# Altium PCB DCDC_POWER_SUPPLY.PcbDoc (part 2 of 2)
Units mm, origin at the board's own origin, x right, y up, seen from the top; angles counter-clockwise.
Board outline 45 x 24.5 mm, 4 copper layers (Top Layer, GND 1, GND 2, Bottom Layer), stack 0.603 mm thick; 43 components, 28 nets, 132 pads, 68 vias.
Unrouted connection lines stored in the file: 3.
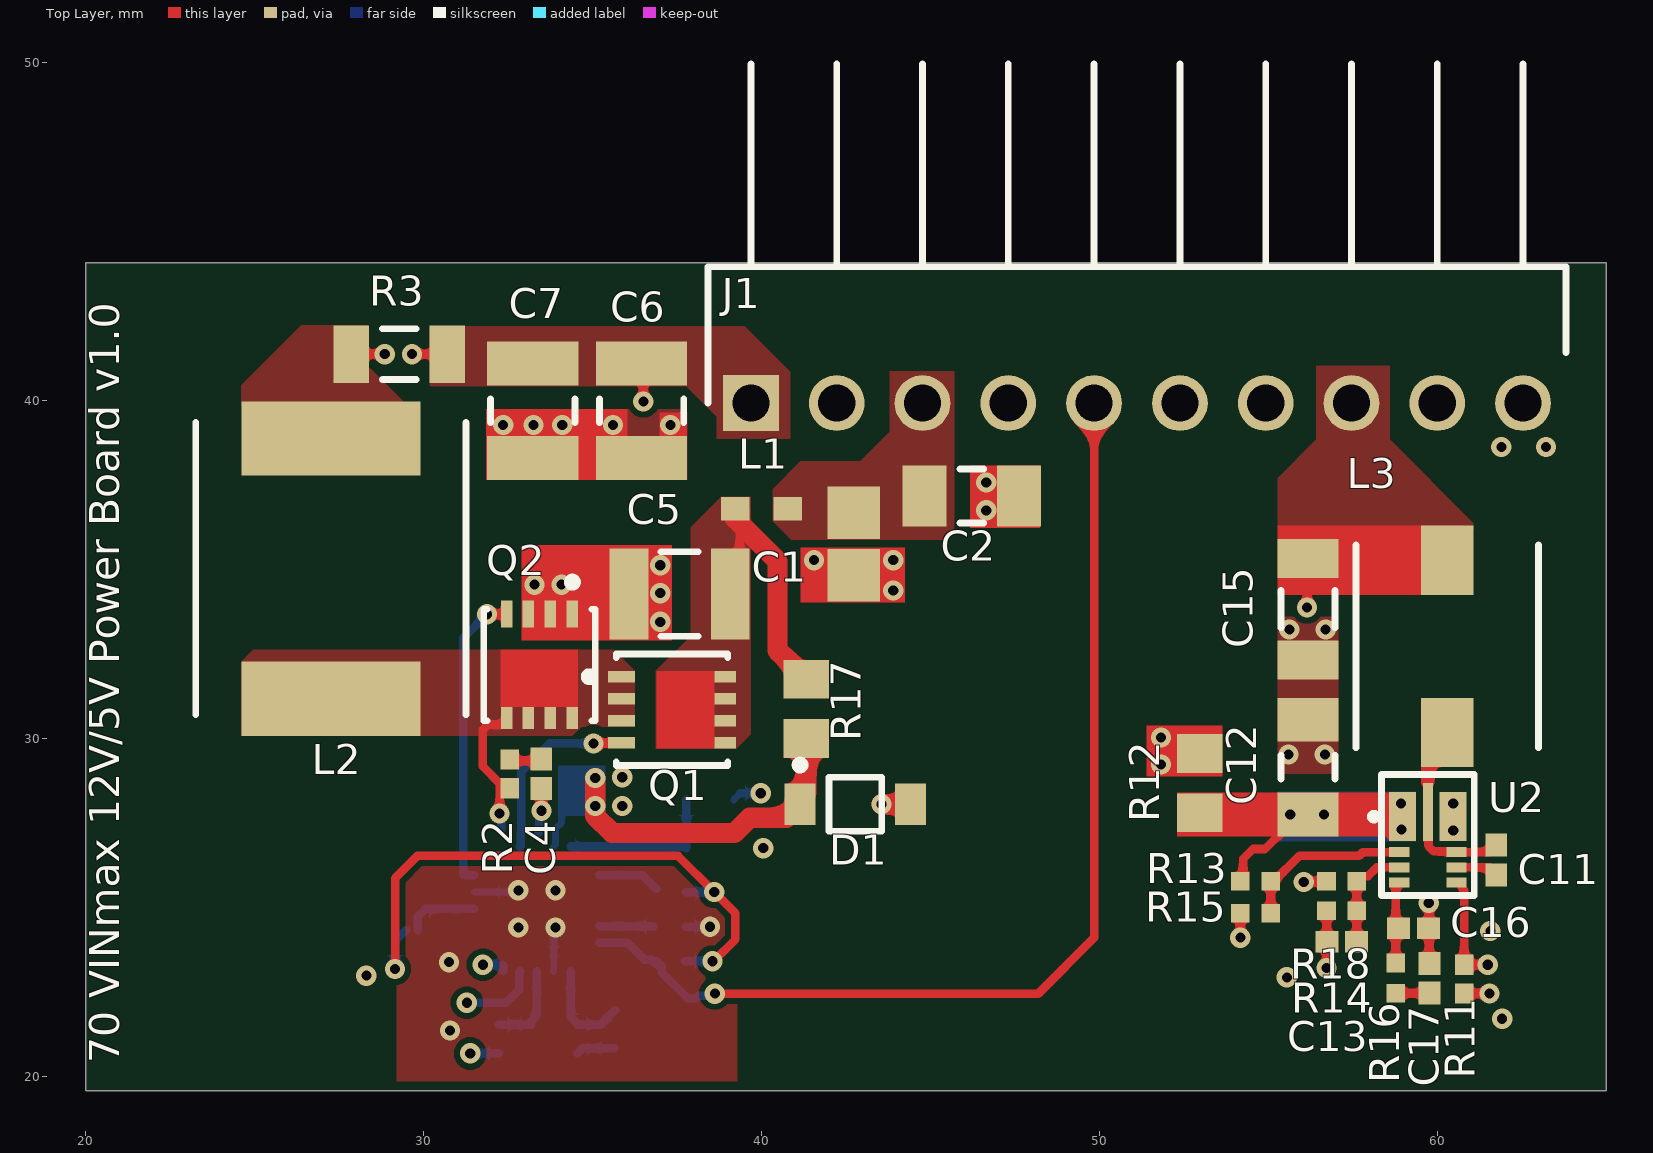
[diagram p0: Top Layer view]

## Part data (continued)
R1: library part CMP-2000-04829-1, "RES SMD 1M OHM 1% 1/10W 0603", Case Code (Imperial)=0603, Case Code (Metric)=1608, Manufacturer=Yageo, Manufacturer Part Number=AC0603FR-071ML, Max Operating Temperature=155°C, Max Power Dissipation=100mW, Min Operating Temperature=-55°C, Package Quantity=1, Resistance=1MR, Resistor Type="Thick Film", Supplier Part Number 1=311-1MLDCT-ND, Temperature coefficient=100ppm/°C, Tolerance=1%, Voltage Rating=50V, Case/Package=0603, Category="Chip SMD Resistors", ComponentLink1Description=https://datasheet.ciiva.com/5562/pyu-ac-51-rohs-l-2-5562551.pdf?src-supplier=Mouser, ComponentLink1URL=https://datasheet.ciiva.com/5562/pyu-ac-51-rohs-l-2-5562551.pdf?src-supplier=Mouser, Features="Moisture Resistant,Automotive AEC-Q200,Anti-Sulfur", Height=0.022inch, Lead Free="Lead Free", Length=0.063inch, Number of Terminations=2, Packaging="Tape and Reel", Part Number=AC0603FR-071ML, Power Rating=100mW, Pricing 1="1=0.10000, 10=0.02900, 100=0.01170, 1000=0.00527, 2500=0.00458 (USD)", RoHS=Yes, RoHS Compliant=Yes, Series=AC, Stock 1=1569, Supplier 1=Digi-Key, Termination=SMD/SMT, Width=0.031inch
R2: library part CMP-2002-07060-1, "Res Thick Film 0402 3.3 Ohm 1% 1/16W ±200ppm/°C Molded SMD Paper T/R", Case Code (Imperial)=0402, Case Code (Metric)=1005, Manufacturer="Yageo / Phycomp", Manufacturer Part Number=RC0402FR-073R3L, Max Operating Temperature=155°C, Max Power Dissipation=63mW, Min Operating Temperature=-55°C, Resistance=3.3R, Resistance Tolerance=1%, Resistor Type="Thick Film", Supplier Part Number 1=311-3.30LRCT-ND, Temperature coefficient=200ppm/°C, Voltage Rating=50V, Case/Package=0402, Category="Chip SMD Resistors", ComponentLink1Description=https://datasheet.ciiva.com/28412/pyu-rc0402-51-rohs-l-6-28412729.pdf?src-supplier=Avnet+Europe, ComponentLink1URL=https://datasheet.ciiva.com/28412/pyu-rc0402-51-rohs-l-6-28412729.pdf?src-supplier=Avnet+Europe, ComponentLink2Description=https://datasheet.ciiva.com/16856/pyu-rc0402-51-rohs-l-6-16856956.pdf?src-supplier=Avnet+Europe, ComponentLink2URL=https://datasheet.ciiva.com/16856/pyu-rc0402-51-rohs-l-6-16856956.pdf?src-supplier=Avnet+Europe, ComponentLink3Description=https://datasheet.ciiva.com/7849/1018594-7849999.pdf?src-supplier=Element14, ComponentLink3URL=https://datasheet.ciiva.com/7849/1018594-7849999.pdf?src-supplier=Element14, ComponentLink4Description=https://datasheet.ciiva.com/8893/pyu-rc0402-51-rohs-l-6-8893711.pdf?src-supplier=Avnet, ComponentLink4URL=https://datasheet.ciiva.com/8893/pyu-rc0402-51-rohs-l-6-8893711.pdf?src-supplier=Avnet, Construction=Rectangular, Contact Plating=Tin,Matte, Depth=0.5mm, Features="Moisture Resistant", Lead Free="Lead Free", Length=1mm, Military Standard=Not, Number of Terminations=2, Packaging="Tape and Reel", Part Number=RC0402FR-073R3L, Power Rating=63mW, Pricing 1="1=0.10000, 10=0.02400, 100=0.00960, 1000=0.00431, 2500=0.00374, 5000=0.00309 (USD)", REACH SVHC=Unknown, RoHS=Yes, RoHS Compliant=Yes, Series=RC, Size Code=0402, Stock 1=461211, Supplier 1=Digi-Key, Termination=SMD/SMT, Tolerance=1%, Voltage Rating (DC)=50V
R3: library part CMP-2003-04053-1, Case Code (Imperial)=1206, Case Code (Metric)=3216, Manufacturer=Yageo, Manufacturer Part Number=RL1206FR-070R027L, Max Operating Temperature=125°C, Max Power Dissipation=250mW, Min Operating Temperature=-55°C, Package Quantity=5000, Resistance=27mR, Resistor Type="Thick Film", Supplier Part Number 1=311-.027LWCT-ND, Temperature coefficient=1200ppm/°C, Tolerance=1%, Case/Package=1206, Category="Chip SMD Resistors", ComponentLink1Description=https://datasheet.ciiva.com/15328/pyu-rl-521-rohs-l-5-15328789.pdf?src-supplier=Mouser, ComponentLink1URL=https://datasheet.ciiva.com/15328/pyu-rl-521-rohs-l-5-15328789.pdf?src-supplier=Mouser, Construction=Rectangular, Depth=1.6mm, Features="Moisture Resistant,Automotive AEC-Q200", Height=0.55mm, Length=3.1mm, Military Standard=Not, Number of Terminations=2, Packaging="Tape and Reel", Part Number=RL1206FR-070R027L, Power Rating=250mW, Pricing 1="1=0.70000, 10=0.54000, 100=0.22710, 1000=0.12530, 2500=0.11747 (USD)", RoHS=Yes, RoHS Compliant=Yes, Series=RL, Stock 1=6389, Supplier 1=Digi-Key, Technology="THICK FILM", Termination=SMD/SMT, Weight=0.000571oz, Width=1.6mm
R4: library part CMP-2100-03662-1, "Chip Resistor, 100 KOhm, +/- 1%, 0.1 W, -55 to 155 degC, 0603 (1608 Metric), RoHS, Tape and Reel", Case Code (Imperial)=0603, Case Code (Metric)=1608, Manufacturer=Yageo, Manufacturer Part Number=RC0603FR-07100KL, Max Operating Temperature=155degC, Max Power Dissipation=100mW, Min Operating Temperature=-55degC, Package Description="2-Pin Surface Mount Device, Body 1.6 x 0.8 mm", Resistance=100KOhm, Resistance Tolerance=1%, Resistor Type="Thick Film", Supplier Part Number 1=311-100KHRCT-ND, Temperature coefficient=100ppm/degreesC, Voltage Rating=50V, Working Voltage=75V, Case/Package=0603, Category="Chip SMD Resistors", ComponentLink1Description=https://datasheet.ciiva.com/11808/0900766b80f96399-11808107.pdf?src-supplier=RSComponents, ComponentLink1URL=https://datasheet.ciiva.com/11808/0900766b80f96399-11808107.pdf?src-supplier=RSComponents, ComponentLink2Description=https://datasheet.ciiva.com/7983/443971-7983593.pdf?src-supplier=Element14, ComponentLink2URL=https://datasheet.ciiva.com/7983/443971-7983593.pdf?src-supplier=Element14, ComponentLink3Description=https://datasheet.ciiva.com/46440/1868787-46440889.pdf?src-supplier=Element14, ComponentLink3URL=https://datasheet.ciiva.com/46440/1868787-46440889.pdf?src-supplier=Element14, ComponentLink4Description=https://datasheet.ciiva.com/7746/1738695-7746234.pdf?src-supplier=Element14, ComponentLink4URL=https://datasheet.ciiva.com/7746/1738695-7746234.pdf?src-supplier=Element14, ComponentLink5Description=https://datasheet.ciiva.com/7746/1738695-7746235.pdf?src-supplier=Element14, ComponentLink5URL=https://datasheet.ciiva.com/7746/1738695-7746235.pdf?src-supplier=Element14, ComponentLink6Description=https://datasheet.ciiva.com/22747/443971-22747516.pdf?src-supplier=Element14, ComponentLink6URL=https://datasheet.ciiva.com/22747/443971-22747516.pdf?src-supplier=Element14, Composition=ThickFilm, Construction=Rectangular, Datasheet URL=http://www.yageo.com/NewPortal/yageodocoutput?fileName=/pdf/R-Chip/PYu-RC_Group_51_RoHS_L_5.pdf, Datasheet Version="Rev. 5, 10/2016", Depth=0.8mm, Features="Moisture Resistant", Height=0.45mm, Lead Free=LeadFree, Length=1.6mm, Manufacturer URL=http://www.yageo.com/, Military Standard=Not, Number of Pins=2, Number of Terminations=2, Package Reference=0603, Packaging=TapeandReel, Power Rating=100mW, Pricing 1="1=0.10000, 10=0.02400, 100=0.00970, 1000=0.00436, 2500=0.00378 (USD)", REACH SVHC=NoSVHC, RoHS=Yes, RoHS Compliant=Yes, RoHSCompliant=true, Series=RC, Stock 1=19737322, Supplier 1=Digi-Key, Technology="THICK FILM", Termination=SMD/SMT, Tolerance=1%, Voltage Rating (DC)=50V, Width=0.8mm
R5 R6 R11: library part CMP-2002-07343-1, "Res General Purpose Thick Film 0402 100K Ohm 1% 1/16W ±100ppm/°C Molded SMD Paper T/R", Case Code (Imperial)=0402, Case Code (Metric)=1005, Manufacturer="Yageo / Phycomp", Manufacturer Part Number=RC0402FR-07100KL, Max Operating Temperature=155°C, Max Power Dissipation=63mW, Min Operating Temperature=-55°C, Package Quantity=1, Resistance=100kR, Resistance Tolerance=1%, Resistor Type="Thick Film", Supplier Part Number 1=311-100KLRCT-ND, Temperature coefficient=100ppm/°C, Voltage Rating=50V, Case/Package=0402, Category="Chip SMD Resistors", ComponentLink1Description=https://datasheet.ciiva.com/11819/0900766b80c66297-11819452.pdf?src-supplier=RSComponents, ComponentLink1URL=https://datasheet.ciiva.com/11819/0900766b80c66297-11819452.pdf?src-supplier=RSComponents, ComponentLink2Description=https://datasheet.ciiva.com/2453/pyu-r-int-thick-7-2453361.pdf?src-supplier=Digi-Key, ComponentLink2URL=https://datasheet.ciiva.com/2453/pyu-r-int-thick-7-2453361.pdf?src-supplier=Digi-Key, ComponentLink3Description=https://datasheet.ciiva.com/2453/pyu-r-int-thick-7-2453362.pdf?src-supplier=Digi-Key, ComponentLink3URL=https://datasheet.ciiva.com/2453/pyu-r-int-thick-7-2453362.pdf?src-supplier=Digi-Key, ComponentLink4Description=https://datasheet.ciiva.com/2453/pyu-r-int-thick-7-2453363.pdf?src-supplier=Digi-Key, ComponentLink4URL=https://datasheet.ciiva.com/2453/pyu-r-int-thick-7-2453363.pdf?src-supplier=Digi-Key, ComponentLink5Description=https://datasheet.ciiva.com/22747/1018594-22747509.pdf?src-supplier=Element14, ComponentLink5URL=https://datasheet.ciiva.com/22747/1018594-22747509.pdf?src-supplier=Element14, ComponentLink6Description=https://datasheet.ciiva.com/15189/getdatasheetpartid-323696-15189334.pdf?src-supplier=Verical, ComponentLink6URL=https://datasheet.ciiva.com/15189/getdatasheetpartid-323696-15189334.pdf?src-supplier=Verical, ComponentLink7Description=https://datasheet.ciiva.com/12667/pyu-rc0402-51-rohs-l-6-r-12667930.pdf?src-supplier=Mouser, ComponentLink7URL=https://datasheet.ciiva.com/12667/pyu-rc0402-51-rohs-l-6-r-12667930.pdf?src-supplier=Mouser, Construction=Rectangular, Depth=0.5mm, Features="Moisture Resistant", Height=0.016inch, Lead Free="Lead Free", Length=0.039inch, Military Standard=Not, Number of Terminations=2, Packaging="Tape and Reel", Part Number=RC0402FR-07100KL, Power Rating=63mW, Pricing 1="1=0.10000, 10=0.01600, 100=0.00640, 1000=0.00286, 2500=0.00248, 5000=0.00205 (USD)", REACH SVHC="No SVHC", RoHS=Yes, RoHS Compliant=Yes, Series=RC, Stock 1=17727422, Supplier 1=Digi-Key, Technology="THICK FILM", Termination=SMD/SMT, Tolerance=1%, Width=0.02inch, Working Voltage=50V
R7: library part CMP-2002-07134-1, Case Code (Imperial)=0402, Case Code (Metric)=1005, Manufacturer="Yageo / Phycomp", Manufacturer Part Number=RC0402FR-07162KL, Max Operating Temperature=155°C, Max Power Dissipation=63mW, Min Operating Temperature=-55°C, Package Quantity=10000, Power Rating=62.5mW, Resistance=162kR, Resistor Type="Thick Film", Supplier Part Number 1=YAG2370CT-ND, Temperature coefficient=100ppm/°C, Tolerance=1%, Voltage Rating=50V, Case/Package=0402, Category="Chip SMD Resistors", ComponentLink1Description=https://datasheet.ciiva.com/16869/pyu-rc0402-51-rohs-l-6-16869191.pdf?src-supplier=Avnet+Europe, ComponentLink1URL=https://datasheet.ciiva.com/16869/pyu-rc0402-51-rohs-l-6-16869191.pdf?src-supplier=Avnet+Europe, ComponentLink2Description=https://datasheet.ciiva.com/2452/pyu-r-int-thick-7-2452605.pdf?src-supplier=Digi-Key, ComponentLink2URL=https://datasheet.ciiva.com/2452/pyu-r-int-thick-7-2452605.pdf?src-supplier=Digi-Key, Construction=Rectangular, Contact Plating=Tin,Matte, Depth=0.5mm, Features="Moisture Resistant", Height=0.016inch, Lead Free="Lead Free", Length=1mm, Military Standard=Not, Number of Terminations=2, Packaging="Tape and Reel", Part Number=RC0402FR-07162KL, Pricing 1="1=0.10000, 10=0.01600, 100=0.00660, 1000=0.00299, 2500=0.00259, 5000=0.00214 (USD)", RoHS=Yes, RoHS Compliant=Yes, Series=RC, Size Code=0402, Stock 1=611980, Supplier 1=Digi-Key, Termination=SMD/SMT, Voltage Rating (DC)=50V, Width=0.02inch
R8: library part CMP-2002-07353-1, Case Code (Imperial)=0402, Case Code (Metric)=1005, Manufacturer="Yageo / Phycomp", Manufacturer Part Number=RC0402FR-0710KL, Max Operating Temperature=155°C, Max Power Dissipation=63mW, Min Operating Temperature=-55°C, Power Rating=62.5mW, Resistance=10kR, Resistance Tolerance=1%, Resistor Type="Thick Film", Supplier Part Number 1=311-10.0KLRCT-ND, Temperature coefficient=100ppm/°C, Voltage Rating=50V, Case/Package=0402, Category="Chip SMD Resistors", ComponentLink1Description=https://datasheet.ciiva.com/7660/38568-7660787.pdf?src-supplier=Element14, ComponentLink1URL=https://datasheet.ciiva.com/7660/38568-7660787.pdf?src-supplier=Element14, ComponentLink2Description=https://datasheet.ciiva.com/7849/1784430-7849813.pdf?src-supplier=Element14, ComponentLink2URL=https://datasheet.ciiva.com/7849/1784430-7849813.pdf?src-supplier=Element14, ComponentLink3Description=https://datasheet.ciiva.com/7849/1686128-7849814.pdf?src-supplier=Element14, ComponentLink3URL=https://datasheet.ciiva.com/7849/1686128-7849814.pdf?src-supplier=Element14, ComponentLink4Description=https://datasheet.ciiva.com/7849/1784430-7849815.pdf?src-supplier=Element14, ComponentLink4URL=https://datasheet.ciiva.com/7849/1784430-7849815.pdf?src-supplier=Element14, ComponentLink5Description=https://datasheet.ciiva.com/22747/1018594-22747512.pdf?src-supplier=Element14, ComponentLink5URL=https://datasheet.ciiva.com/22747/1018594-22747512.pdf?src-supplier=Element14, ComponentLink6Description=https://datasheet.ciiva.com/12667/pyu-rc0402-51-rohs-l-6-r-12667067.pdf?src-supplier=Mouser, ComponentLink6URL=https://datasheet.ciiva.com/12667/pyu-rc0402-51-rohs-l-6-r-12667067.pdf?src-supplier=Mouser, ComponentLink7Description=https://datasheet.ciiva.com/7983/1018594-7983486.pdf?src-supplier=Element14, ComponentLink7URL=https://datasheet.ciiva.com/7983/1018594-7983486.pdf?src-supplier=Element14, Construction=Rectangular, Depth=0.5mm, Features="Moisture Resistant", Height=0.32mm, Lead Free="Lead Free", Lead Pitch=0.2mm, Length=1mm, Military Standard=Not, Number of Pins=2, Number of Terminations=2, Packaging="Tape and Reel", Part Number=RC0402FR-0710KL, Pricing 1="1=0.10000, 10=0.01600, 100=0.00660, 1000=0.00299, 2500=0.00259, 5000=0.00214 (USD)", REACH SVHC="No SVHC", RoHS=Yes, RoHS Compliant=Yes, Series=RC, Stock 1=26492001, Supplier 1=Digi-Key, Termination=SMD/SMT, Tolerance=1%, Voltage Rating (DC)=50V, Width=0.5mm, Working Voltage=50V
R9: library part CMP-2002-00838-1, "RES SMD 28.7K OHM 1% 1/10W 0402", Case Code (Imperial)=0402, Case Code (Metric)=1005, Manufacturer=Panasonic, Manufacturer Part Number=ERJ-2RKF2872X, Max Operating Temperature=155°C, Max Power Dissipation=100mW, Min Operating Temperature=-55°C, Package Quantity=10000, Resistance=28.7kR, Resistance Tolerance=1%, Resistor Type="Thick Film", Supplier Part Number 1=P28.7KLCT-ND, Temperature coefficient=100ppm/°C, Voltage Rating=50V, Case/Package=0402, Category="Chip SMD Resistors", ComponentLink1Description=https://datasheet.ciiva.com/16758/70260748-16758328.pdf?src-supplier=Allied+Electronics, ComponentLink1URL=https://datasheet.ciiva.com/16758/70260748-16758328.pdf?src-supplier=Allied+Electronics, ComponentLink2Description=https://datasheet.ciiva.com/28536/1694929-28536072.pdf?src-supplier=Element14, ComponentLink2URL=https://datasheet.ciiva.com/28536/1694929-28536072.pdf?src-supplier=Element14, ComponentLink3Description=https://datasheet.ciiva.com/16783/70260748-16783354.pdf?src-supplier=Allied+Electronics, ComponentLink3URL=https://datasheet.ciiva.com/16783/70260748-16783354.pdf?src-supplier=Allied+Electronics, ComponentLink4Description=https://datasheet.ciiva.com/24069/aoa0000ce2-24069212.pdf?src-supplier=Mouser, ComponentLink4URL=https://datasheet.ciiva.com/24069/aoa0000ce2-24069212.pdf?src-supplier=Mouser, ComponentLink5Description=https://datasheet.ciiva.com/46441/1678782-46441260.pdf?src-supplier=Element14, ComponentLink5URL=https://datasheet.ciiva.com/46441/1678782-46441260.pdf?src-supplier=Element14, ComponentLink6Description=https://datasheet.ciiva.com/30105/aoa0000ce2-30105661.pdf?src-supplier=Onlinecomponents.com, ComponentLink6URL=https://datasheet.ciiva.com/30105/aoa0000ce2-30105661.pdf?src-supplier=Onlinecomponents.com, ComponentLink7Description=https://datasheet.ciiva.com/9191/aoa0000ce2-9191054.pdf?src-supplier=Avnet, ComponentLink7URL=https://datasheet.ciiva.com/9191/aoa0000ce2-9191054.pdf?src-supplier=Avnet, Construction=Rectangular, Contact Plating=Tin, Depth=0.5mm, Height=0.016inch, Lead Free="Lead Free", Length=1mm, Military Standard=Not, Mount="Surface Mount", Number of Terminations=2, Packaging="Tape and Reel", Part Number=ERJ-2RKF2872X, Power Rating=100mW, Pricing 1="1=0.10000, 10=0.02500, 100=0.01020, 1000=0.00457, 2500=0.00397, 5000=0.00328 (USD)", REACH SVHC=Unknown, RoHS=Yes, RoHS Compliant=Yes, Series=ERJ, Stock 1=33664, Supplier 1=Digi-Key, Termination=SMD/SMT, Tolerance=1%, Voltage Rating (DC)=50V, Width=0.02inch
R10: library part CMP-1011-00803-2, "Res Thick Film 0402 392K Ohm 1% 1/16W 100ppm/C Molded SMD Paper T/R", Case Code (Imperial)=0402, Case Code (Metric)=1005, Manufacturer=Yageo, Manufacturer Part Number=RC0402FR-07392KL, Max Operating Temperature=155°C, Max Power Dissipation=63mW, Min Operating Temperature=-55°C, Part Number=RC0402FR07392KL, Power Rating=62.5mW, Resistance=392kR, Resistor Type="Thick Film", Supplier Part Number 1=YAG3144CT-ND, Temperature coefficient=100ppm/°C, Tolerance=1%, Voltage Rating=50V, Case/Package=0402, Category="Chip SMD Resistors", ComponentLink1Description=https://datasheet.ciiva.com/5558/pyu-rc0402-51-rohs-l-6-r-5558085.pdf?src-supplier=Mouser, ComponentLink1URL=https://datasheet.ciiva.com/5558/pyu-rc0402-51-rohs-l-6-r-5558085.pdf?src-supplier=Mouser, ComponentLink2Description=https://datasheet.ciiva.com/16857/pyu-rc0402-51-rohs-l-6-16857542.pdf?src-supplier=Avnet+Europe, ComponentLink2URL=https://datasheet.ciiva.com/16857/pyu-rc0402-51-rohs-l-6-16857542.pdf?src-supplier=Avnet+Europe, ComponentLink3Description=https://datasheet.ciiva.com/8885/pyu-rc0402-51-rohs-l-6-8885851.pdf?src-supplier=Avnet, ComponentLink3URL=https://datasheet.ciiva.com/8885/pyu-rc0402-51-rohs-l-6-8885851.pdf?src-supplier=Avnet, ComponentLink4Description=https://datasheet.ciiva.com/28390/pyu-rc0402-51-rohs-l-6-28390879.pdf?src-supplier=Avnet+Europe, ComponentLink4URL=https://datasheet.ciiva.com/28390/pyu-rc0402-51-rohs-l-6-28390879.pdf?src-supplier=Avnet+Europe, Construction=Rectangular, Contact Plating=Tin,Matte, Depth=0.5mm, Features="Moisture Resistant", Height=0.016inch, Lead Free="Lead Free", Length=1mm, Military Standard=Not, Number of Terminations=2, Packaging="Tape and Reel", Pricing 1="1=0.10000, 10=0.01600, 100=0.00660, 1000=0.00299, 2500=0.00259, 5000=0.00214 (USD)", RoHS=Yes, RoHS Compliant=Yes, Series=RC, Size Code=0402, Stock 1=637, Supplier 1=Digi-Key, Termination=SMD/SMT, Voltage Rating (DC)=50V, Width=0.02inch
R12 R17: library part CMP-1665-00033-1, "Chip Resistor, 4.7 Ohm, +/- 1%, 125 mW, -55 to 125 degC, 0805 (2012 Metric), RoHS, Tape and Reel", Case Code (Imperial)=0805, Case Code (Metric)=2012, Manufacturer=Panasonic, Manufacturer Part Number=ERJ-6RQF4R7V, Max Operating Temperature="125 degC", Max Power Dissipation=125mW, Min Operating Temperature="-55 degC", Package Quantity=5000, Power Rating="125 mW", Resistance="4.7 Ohm", Supplier Part Number 1=P4.7DCT-ND, Temperature coefficient=200ppm/°C, Tolerance=1%, Case/Package=0805, Case\/Package=0805, Category="Chip SMD Resistors", ComponentLink1Description="Manufacturer URL", ComponentLink1URL=http://www.panasonic.com/, ComponentLink2Description=Datasheet, ComponentLink2URL=http://industrial.panasonic.com/cdbs/www-data/pdf/RDA0000/AOA0000C86.pdf, ComponentLink3Description=https://datasheet.ciiva.com/11818/0900766b80eefa12-11818492.pdf?src-supplier=RSComponents, ComponentLink3URL=https://datasheet.ciiva.com/11818/0900766b80eefa12-11818492.pdf?src-supplier=RSComponents, ComponentLink4Description=https://datasheet.ciiva.com/25711/391509-25711737.pdf?src-supplier=Farnell, ComponentLink4URL=https://datasheet.ciiva.com/25711/391509-25711737.pdf?src-supplier=Farnell, ComponentLink5Description=https://datasheet.ciiva.com/17213/aoa0000ce3-17213115.pdf?src-supplier=Avnet+Europe, ComponentLink5URL=https://datasheet.ciiva.com/17213/aoa0000ce3-17213115.pdf?src-supplier=Avnet+Europe, ComponentLink6Description=https://datasheet.ciiva.com/22746/391509-22746507.pdf?src-supplier=Element14, ComponentLink6URL=https://datasheet.ciiva.com/22746/391509-22746507.pdf?src-supplier=Element14, ComponentLink7Description=https://datasheet.ciiva.com/9195/aoa0000ce3-9195709.pdf?src-supplier=Avnet, ComponentLink7URL=https://datasheet.ciiva.com/9195/aoa0000ce3-9195709.pdf?src-supplier=Avnet, ComponentLink8Description=https://datasheet.ciiva.com/16761/70068852-16761070.pdf?src-supplier=Allied+Electronics, ComponentLink8URL=https://datasheet.ciiva.com/16761/70068852-16761070.pdf?src-supplier=Allied+Electronics, ComponentLink9Description=https://datasheet.ciiva.com/22730/391509-22730382.pdf?src-supplier=Element14, ComponentLink9URL=https://datasheet.ciiva.com/22730/391509-22730382.pdf?src-supplier=Element14, ComponentLink10Description=https://datasheet.ciiva.com/24026/aoa0000ce3-72189-24026846.pdf?src-supplier=Mouser, ComponentLink10URL=https://datasheet.ciiva.com/24026/aoa0000ce3-72189-24026846.pdf?src-supplier=Mouser, ComponentLink11Description=https://datasheet.ciiva.com/30074/6aoa0000ce3-30074670.pdf?src-supplier=Onlinecomponents.com, ComponentLink11URL=https://datasheet.ciiva.com/30074/6aoa0000ce3-30074670.pdf?src-supplier=Onlinecomponents.com, Composition="Thick Film", Contact Plating=Tin, DatasheetVersion=04/2015, Depth=1.25mm, Height="0.028 inch", Lead Free="Lead Free", Length="0.079 inch", Military Standard=Not, Mount="Surface Mount", Mounting Technology="Surface Mount", Number of Pins=2, Number of Terminations=2, PackageDescription="2-Pin Surface Mount Device, Body 2 x 1.5 mm", PackageReference=0805, Packaging="Tape and Reel", PartNumber=ERJ-6RQF4R7V, Pins=2, Pricing 1="1=0.37000, 10=0.31100, 25=0.22640, 50=0.16420, 100=0.12170, 250=0.09340, 500=0.07358, 1000=0.05094 (USD)", Radiation Hardening=No, REACH SVHC="No SVHC", RoHS=Yes, RoHSCompliant=true, Stock 1=7470, Supplier 1=Digi-Key, Termination=SMD/SMT, Width="0.049 inch"
R13 R15: library part CMP-2002-00968-1, "ERJ-2RKF4993X", Case Code (Imperial)=0402, Case Code (Metric)=1005, Manufacturer=Panasonic, Max Operating Temperature=155°C, Max Power Dissipation=100mW, Min Operating Temperature=-55°C, Package Quantity=1, Resistance=499kR, Supplier Part Number 1=P499KLCT-ND, Temperature coefficient=100ppm/°C, Tolerance=1%, Voltage Rating=50V, Case/Package=0402, Category="Chip SMD Resistors", ComponentLink1Description=https://datasheet.ciiva.com/28610/1678782-28610966.pdf?src-supplier=Element14, ComponentLink1URL=https://datasheet.ciiva.com/28610/1678782-28610966.pdf?src-supplier=Element14, ComponentLink2Description=https://datasheet.ciiva.com/24163/aoa0000ce2-24163576.pdf?src-supplier=Mouser, ComponentLink2URL=https://datasheet.ciiva.com/24163/aoa0000ce2-24163576.pdf?src-supplier=Mouser, ComponentLink3Description=https://datasheet.ciiva.com/9181/aoa0000ce2-9181513.pdf?src-supplier=Avnet, ComponentLink3URL=https://datasheet.ciiva.com/9181/aoa0000ce2-9181513.pdf?src-supplier=Avnet, ComponentLink4Description=https://datasheet.ciiva.com/5951/426256-5951322.pdf?src-supplier=Farnell, ComponentLink4URL=https://datasheet.ciiva.com/5951/426256-5951322.pdf?src-supplier=Farnell, ComponentLink5Description=https://datasheet.ciiva.com/43460/426256-43460346.pdf?src-supplier=Farnell, ComponentLink5URL=https://datasheet.ciiva.com/43460/426256-43460346.pdf?src-supplier=Farnell, ComponentLink6Description=https://datasheet.ciiva.com/9181/aoa0000ce2-9181509.pdf?src-supplier=Avnet, ComponentLink6URL=https://datasheet.ciiva.com/9181/aoa0000ce2-9181509.pdf?src-supplier=Avnet, ComponentLink7Description=https://datasheet.ciiva.com/28672/1678782-28672345.pdf?src-supplier=Element14, ComponentLink7URL=https://datasheet.ciiva.com/28672/1678782-28672345.pdf?src-supplier=Element14, ComponentLink8Description=https://datasheet.ciiva.com/46377/426256-46377753.pdf?src-supplier=Element14, ComponentLink8URL=https://datasheet.ciiva.com/46377/426256-46377753.pdf?src-supplier=Element14, ComponentLink9Description=https://datasheet.ciiva.com/16760/70260748-16760715.pdf?src-supplier=Allied+Electronics, ComponentLink9URL=https://datasheet.ciiva.com/16760/70260748-16760715.pdf?src-supplier=Allied+Electronics, Composition="Thick Film", Contact Plating=Tin, Depth=0.5mm, Features="Automotive AEC-Q200", Height=0.016inch, Lead Free="Lead Free", Length=1mm, Manufacturer Part Number=ERJ-2RKF4993X, Military Standard=Not, Mount="Surface Mount", Number of Terminations=2, Packaging="Tape and Reel", Part Number=ERJ-2RKF4993X, Power Rating=100mW, Pricing 1="1=0.10000, 10=0.04000, 100=0.01620, 1000=0.00729, 2500=0.00632, 5000=0.00523 (USD)", REACH SVHC=Unknown, RoHS=Yes, Stock 1=131008, Supplier 1=Digi-Key, Termination=SMD/SMT, Voltage Rating (DC)=50V, Weight=2.8E-05oz, Width=0.5mm
R14: library part CMP-2002-00386-1, "RES SMD 158K OHM 1% 1/16W 0402", Case Code (Imperial)=0402, Case Code (Metric)=1005, Manufacturer="Vishay Dale", Manufacturer Part Number=CRCW0402158KFKTD, Max Operating Temperature=155°C, Max Power Dissipation=63mW, Min Operating Temperature=-55°C, Package Quantity=10000, Resistance=158kR, Resistance Tolerance=1%, Resistor Type="Thick Film", Temperature coefficient=100ppm/°C, Voltage Rating=50V, Case/Package=0402, Category="Chip SMD Resistors", ComponentLink1Description=https://datasheet.ciiva.com/8967/dcrcw-8967692.pdf?src-supplier=Avnet, ComponentLink1URL=https://datasheet.ciiva.com/8967/dcrcw-8967692.pdf?src-supplier=Avnet, ComponentLink2Description=https://datasheet.ciiva.com/2563/dcrcw-2563087.pdf?src-supplier=Digi-Key, ComponentLink2URL=https://datasheet.ciiva.com/2563/dcrcw-2563087.pdf?src-supplier=Digi-Key, Contact Plating=Tin,Lead, Features="Automotive AEC-Q200", Height=0.016inch, Lead Free="Contains Lead", Length=0.039inch, Number of Pins=2, Number of Terminations=2, Packaging="Tape and Reel", Part Number=CRCW0402158KFKTD, Power Rating=63mW, Pricing 1="10000=0.02620, 20000=0.02556, 40000=0.02520, 60000=0.02448, 80000=0.02394, 100000=0.02340, 1000000=0.02286 (USD)", Radiation Hardening=No, REACH SVHC=Unknown, RoHS=No, RoHS Compliant=No, Series=CRCW, Stock 1=10000, Supplier 1=Avnet, Supplier Part Number 1=CRCW0402158KFKTD, Termination=SMD/SMT, Tolerance=1%, Voltage Rating (DC)=50V, Weight=2.3E-05oz, Width=0.02inch
R16: library part CMP-2002-08626-1, "Surface Mount Chip Resistor, Thick Film, AEC-Q200 CRCW Series, 42.2 kohm, 63 mW,  1%, 50 V", Case Code (Imperial)=0402, Case Code (Metric)=1005, Manufacturer="Vishay Dale", Manufacturer Part Number=CRCW040242K2FKED, Max Operating Temperature=155°C, Max Power Dissipation=63mW, Min Operating Temperature=-55°C, Package Quantity=10, Resistance=42.2kR, Resistance Tolerance=1%, Resistor Type="Thick Film", Supplier Part Number 1=52K7062, Temperature coefficient=100ppm/°C, Voltage Rating=50V, Case/Package=0402, Category="Chip SMD Resistors", ComponentLink1Description=https://datasheet.ciiva.com/3882/41397335s9853079n6892-3882805.pdf?src-supplier=Arrow+Electronics, ComponentLink1URL=https://datasheet.ciiva.com/3882/41397335s9853079n6892-3882805.pdf?src-supplier=Arrow+Electronics, ComponentLink2Description=https://datasheet.ciiva.com/11818/0900766b80d98824-11818095.pdf?src-supplier=RSComponents, ComponentLink2URL=https://datasheet.ciiva.com/11818/0900766b80d98824-11818095.pdf?src-supplier=RSComponents, ComponentLink3Description=https://datasheet.ciiva.com/2494/dcrcwe3-2494976.pdf?src-supplier=Digi-Key, ComponentLink3URL=https://datasheet.ciiva.com/2494/dcrcwe3-2494976.pdf?src-supplier=Digi-Key, ComponentLink4Description=https://datasheet.ciiva.com/2494/dcrcwe3-2494977.pdf?src-supplier=Digi-Key, ComponentLink4URL=https://datasheet.ciiva.com/2494/dcrcwe3-2494977.pdf?src-supplier=Digi-Key, ComponentLink5Description=https://datasheet.ciiva.com/3256/dcrcwe3-3256517.pdf?src-supplier=Avnet, ComponentLink5URL=https://datasheet.ciiva.com/3256/dcrcwe3-3256517.pdf?src-supplier=Avnet, ComponentLink6Description=https://datasheet.ciiva.com/16763/70201119-16763237.pdf?src-supplier=Allied+Electronics, ComponentLink6URL=https://datasheet.ciiva.com/16763/70201119-16763237.pdf?src-supplier=Allied+Electronics, ComponentLink7Description=https://datasheet.ciiva.com/8336/dcrcwe3-8336730.pdf?src-supplier=Avnet, ComponentLink7URL=https://datasheet.ciiva.com/8336/dcrcwe3-8336730.pdf?src-supplier=Avnet, ComponentLink8Description=https://datasheet.ciiva.com/7743/125364-7743643.pdf?src-supplier=Element14, ComponentLink8URL=https://datasheet.ciiva.com/7743/125364-7743643.pdf?src-supplier=Element14, ComponentLink9Description=https://datasheet.ciiva.com/2494/dcrcwe3-2494975.pdf?src-supplier=Digi-Key, ComponentLink9URL=https://datasheet.ciiva.com/2494/dcrcwe3-2494975.pdf?src-supplier=Digi-Key, ComponentLink10Description=https://datasheet.ciiva.com/7671/1697337-7671599.pdf?src-supplier=Element14, ComponentLink10URL=https://datasheet.ciiva.com/7671/1697337-7671599.pdf?src-supplier=Element14, ComponentLink11Description=https://datasheet.ciiva.com/22702/1697337-22702879.pdf?src-supplier=Element14, ComponentLink11URL=https://datasheet.ciiva.com/22702/1697337-22702879.pdf?src-supplier=Element14, Construction=Rectangular, Contact Plating=Tin, Depth=0.5mm, Features="Automotive AEC-Q200", Height=0.35mm, Lead Free="Lead Free", Length=1mm, Military Standard=Not, Number of Pins=2, Number of Terminations=2, Packaging="Tape and Reel", Part Number=CRCW040242K2FKED, Power Rating=63mW, Pricing 1="1=0.00500, 25=0.00500, 100=0.00500, 250=0.00500, 500=0.00500, 1000=0.00400 (USD)", Radiation Hardening=No, REACH SVHC=Unknown, RoHS=Yes, RoHS Compliant=Yes, Series=CRCW, Size Code=0402, Stock 1=19822, Supplier 1=Newark, Technology="THICK FILM", Termination=SMD/SMT, Tolerance=1%, Voltage Rating (DC)=50V, Weight=2.3E-05oz, Width=0.02inch
R18: library part CMP-1011-00675-2, "Res Thick Film 0402 30K Ohm 1% 0.063W(1/16W) ±100ppm/C Molded SMD Automotive Paper T/R", Case Code (Imperial)=0402, Case Code (Metric)=1005, Manufacturer="Vishay Dale", Manufacturer Part Number=CRCW040230K0FKED, Max Operating Temperature=155°C, Max Power Dissipation=63mW, Min Operating Temperature=-55°C, Package Quantity=10000, Resistance=30kR, Resistance Tolerance=1%, Resistor Type="Thick Film", Supplier Part Number 1=6789140, Temperature coefficient=100ppm/°C, Voltage Rating=50V, Case/Package=0402, Category="Chip SMD Resistors", ComponentLink1Description=https://datasheet.ciiva.com/11811/0900766b80d98824-11811264.pdf?src-supplier=RSComponents, ComponentLink1URL=https://datasheet.ciiva.com/11811/0900766b80d98824-11811264.pdf?src-supplier=RSComponents, ComponentLink2Description=https://datasheet.ciiva.com/7673/1697337-7673253.pdf?src-supplier=Element14, ComponentLink2URL=https://datasheet.ciiva.com/7673/1697337-7673253.pdf?src-supplier=Element14, ComponentLink3Description=https://datasheet.ciiva.com/2464/dcrcwe3-2464534.pdf?src-supplier=Digi-Key, ComponentLink3URL=https://datasheet.ciiva.com/2464/dcrcwe3-2464534.pdf?src-supplier=Digi-Key, ComponentLink4Description=https://datasheet.ciiva.com/7673/1697337-7673254.pdf?src-supplier=Element14, ComponentLink4URL=https://datasheet.ciiva.com/7673/1697337-7673254.pdf?src-supplier=Element14, ComponentLink5Description=https://datasheet.ciiva.com/2464/dcrcwe3-2464535.pdf?src-supplier=Digi-Key, ComponentLink5URL=https://datasheet.ciiva.com/2464/dcrcwe3-2464535.pdf?src-supplier=Digi-Key, ComponentLink6Description=https://datasheet.ciiva.com/2464/dcrcwe3-2464536.pdf?src-supplier=Digi-Key, ComponentLink6URL=https://datasheet.ciiva.com/2464/dcrcwe3-2464536.pdf?src-supplier=Digi-Key, ComponentLink7Description=https://datasheet.ciiva.com/16886/dcrcwe3-16886248.pdf?src-supplier=Avnet+Europe, ComponentLink7URL=https://datasheet.ciiva.com/16886/dcrcwe3-16886248.pdf?src-supplier=Avnet+Europe, ComponentLink8Description=https://datasheet.ciiva.com/3256/dcrcwe3-3256380.pdf?src-supplier=Avnet, ComponentLink8URL=https://datasheet.ciiva.com/3256/dcrcwe3-3256380.pdf?src-supplier=Avnet, ComponentLink9Description=https://datasheet.ciiva.com/22702/1697337-22702876.pdf?src-supplier=Element14, ComponentLink9URL=https://datasheet.ciiva.com/22702/1697337-22702876.pdf?src-supplier=Element14, ComponentLink10Description=https://datasheet.ciiva.com/16784/70201119-16784286.pdf?src-supplier=Allied+Electronics, ComponentLink10URL=https://datasheet.ciiva.com/16784/70201119-16784286.pdf?src-supplier=Allied+Electronics, Construction=Rectangular, Contact Plating=Tin, Depth=0.5mm, Features="Automotive AEC-Q200", Height=0.35mm, Lead Free="Lead Free", Length=1mm, Military Standard=Not, Mount="Surface Mount", Number of Pins=2, Number of Terminations=2, Packaging="Tape and Reel", Part Number=CRCW040230K0FKED, Power Rating=63mW, Pricing 1="50=0.04000, 500=0.01600, 1250=0.00800 (USD)", Radiation Hardening=No, REACH SVHC=Unknown, RoHS=Yes, RoHS Compliant=Yes, Series=CRCW, Size Code=0402, Stock 1=19350, Supplier 1=RSComponents, Technology="THICK FILM", Termination=SMD/SMT, Tolerance=1%, Voltage Rating (DC)=50V, Weight=2.3E-05oz, Width=0.5mm
U1: "Industry's Lowest 70V IQ Automotive Synchronous Step-Down Controller Uses Only 7µA of Quiescent Current", Manufacturer="Maxim Integrated", Manufacturer Part Number=MAX25208ATPA/VY+T, ComponentLink1Description=http://datasheet.octopart.com/MAX25208ATPA-VY%2BT-Maxim-Integrated-datasheet-150864306.pdf?src-supplier=Ciiva+Crawler, ComponentLink1URL=http://datasheet.octopart.com/MAX25208ATPA-VY%2BT-Maxim-Integrated-datasheet-150864306.pdf?src-supplier=Ciiva+Crawler, Pricing 1="2500=2.19325, 5000=2.16225, 10000=2.13125, 15000=2.10025, 20000=2.06925, 25000=2.03825, 250000=2.00725 (USD)", Supplier 1=Avnet, Supplier Part Number 1=MAX25208ATPA/VY+T
U2: "Integrated Circuit", Manufacturer_Name="Diodes Inc.", Mouser Part Number=621-AP63357QZV-7, Datasheet Link=https://www.diodes.com/assets/Datasheets/AP63356Q_AP63357Q.pdf, Height=0.85mm, Manufacturer_Part_Number=AP63357QZV-7, Mouser Price/Stock=https://www.mouser.co.uk/ProductDetail/Diodes-Incorporated/AP63357QZV-7?qs=DPoM0jnrROUeS%2FU8ZrDy%2FA%3D%3D

## Via types
v1: diameter 0.6, hole 0.3, Top Layer to Bottom Layer, tented both sides, 68 vias

## Nets (pads, with @x,y where several pads share a name; then routed paths per layer and width w, separated by ;. In a path a pad name is that pad's centre, name@x,y a point inside that pad or via, vN(x,y) a via of type N, cw(c..) or ccw(c..) an arc to the next point about the centre after c; other vN are vias at no path point)
BIAS: C8.2 R5.1 R6.1 U1.13 | length 20.6
  Top Layer w0.254: v1(29.15,23.175) 29.15,25.861 29.81,26.52 37.53,26.52 v1(38.6,25.45) 39.225,24.825 39.225,24.05 v1@38.575,23.4
  Bottom Layer w0.254: v1(29.15,23.175) 29.15,24 C8.2 ; C8.2@29.825,24.325 29.825,24.725 30.05,24.95 U1.13 ; R5.1 v1(38.55,23.4) ; R6.1 v1(38.6,25.45)
GND: C1.1 C2.1 C5.1 C6.1 C7.1 C8.1 C9.1 C10.1 C12.1 C15.1 C16.1 C17.1 C18.1 D1.2 J1.2 J1.4 J1.6 J1.7 J1.9 Q2.1 Q2.2 Q2.3 R4.1 R8.1 R9.1 R15.1 R18.1 U1.7 U1.14 U1.21 U2.8 | length 11.7
  Top Layer w0.254: v1(41.55,35.275) 42.138,35.275 C1.1@42.575,34.837 ; v1(43.9,34.375) 43.037,34.375 C1.1@42.575,34.837 ; v1(43.9,35.275) 43.012,35.275 C1.1@42.575,34.837 ; v1(54.175,24.1) R15.1 ; v1(56.05,25.75) 56.063,25.762 56.713,25.762 R18.1 ; v1(59.75,25.125) 59.763,25.112 59.763,23.353 C17.1
  Top Layer w0.6: v1(43.55,28.05) D1.2
  Bottom Layer w0.2: U1.14 32.75,25.45 v1(32.8,25.5) ; U1.7 33.85,24.35 v1(33.9,24.4)
  Bottom Layer w0.254: R9.1 v1(38.475,24.425) v1@38.5,24.4
  other v1: 30.775,21.35 61.925,21.7 55.55,22.925 28.3,22.975 30.75,23.375 61.575,24.3 32.8,24.4 33.9,25.5 40.05,26.75 60.475,27.275 35.875,28 60.475,28.075 35.875,28.85 55.6,29.525 56.675,29.525 55.625,33.225 56.7,33.225 37,33.45 37,34.3 33.275,34.55 34.075,34.55 37,35.125 46.65,36.75 46.65,37.575 61.9,38.625 63.225,38.625 32.35,39.275 33.25,39.275 34.1,39.275 35.6,39.275 37.3,39.275
NetC4_1: C4.1 U1.18 | length 1.3
  Top Layer w0.254: C4.1@33.475,28.46 33.48,28.455 33.48,27.863 v1(33.486,27.858)
  Bottom Layer w0.254: U1.18@33.389,27.198 33.389,27.355 33.419,27.386 33.419,27.791 v1(33.486,27.858)
NetC4_2: C4.2 R2.2 | length 0.9
  Top Layer w0.254: R2.2@32.55,29.325 32.558,29.333 33.467,29.333 C4.2@33.475,29.34
NetC5_2: C5.2 L1.2 Q1.5 Q1.6 Q1.7 Q1.8 R17.2 | length 7.5
  Top Layer w0.254: C5.2@39.35,35.116 39.35,36.275
  Top Layer w0.6: L1.2@39.225,36.5 L1.2 ; L1.2@39.225,36.75 39.35,36.75 39.35,36.375 40.475,35.25 40.475,32.6 40.95,32.125 40.95,32.025 41.225,31.75 R17.2
NetC9_2: C9.2 R10.2 U1.6 | length 2.9
  Bottom Layer w0.254: U1.6 34.35,21.75 34.55,21.55 R10.2 35.24,21.525 C9.2
NetC10_2: C10.2 R10.1 | length 1.1
  Bottom Layer w0.254: R10.1 34.55,20.677 34.698,20.825 C10.2
NetC11_1: C11.1 L3.1 U2.7 U2.9 | length 4.9
  Top Layer w0.254: U2.9 59.748,27.796 59.748,26.801 59.897,26.652 60.402,26.652 60.423,26.631 61.557,26.631 61.75,26.824 C11.1
  Top Layer w0.4: 59.725,28.7 59.725,29.6 L3.1
NetC11_2: C11.2 U2.6 | length 1.3
  Top Layer w0.254: U2.6 61.549,26.181 61.75,25.98 C11.2
NetC12_2: C12.2 R12.1 R13.2 U2.1 | length 3.9
  Top Layer w0.254: R13.2 54.256,25.856 54.256,26.431 54.55,26.725 54.9,26.725 55.925,27.75 C12.2 ; U2.1@58.925,27.732 v1(58.925,28.075) ; v1(58.95,27.3) 58.975,27.325 U2.1
  other v1: 55.65,27.75 56.65,27.75
NetC13_1: C13.1 R14.1 R18.2 U2.3 | length 3.2
  Top Layer w0.254: C13.1 57.62,23.98 57.62,24.9 57.62,25.77 57.773,25.923 57.953,25.923 58.211,26.181 U2.3
NetC16_2: C16.2 R16.2 U2.4 | length 2.4
  Top Layer w0.254: R16.2 58.775,25.625 U2.4@58.875,25.725
NetC17_2: C17.2 R16.1 | length 1
  Top Layer w0.254: R16.1 58.78,22.455 59.77,22.455 C17.2
NetC18_2: C18.2 D1.1 R1.2 R17.1 U1.19 | length 13.2
  Top Layer w0.6: v1(35.075,28.825) 35.075,27.7 35.575,27.2 39.2,27.2 39.65,27.65 40.74,27.65 40.83,27.74 40.985,27.74 41.14,27.895 D1.1 41.14,28.205 41.325,28.39 R17.1
  Bottom Layer w0.2: U1.19 33.9,26.85 33.9,27.325 34.075,27.5 34.075,28.2 C18.2 ; R1.2 R1.2@39.375,28.375
  Bottom Layer w0.254: C18.2@34.675,28.45 35.075,28.05 v1(35.075,28) ; R1.2@39.375,28.375 v1(39.975,28.375)
NetJ1_5: J1.5 R5.2 U1.5 | length 32.1
  Top Layer w0.254: v1(38.617,22.442) 48.192,22.442 49.845,24.095 J1.5
  Bottom Layer w0.254: U1.5 36.031,23.95 36.533,23.448 36.752,23.448 R5.2@36.9,23.3 ; R5.2 36.9,23.4 37.048,23.252 37.048,23.071 37.809,22.31 38.063,22.31 38.129,22.376 38.551,22.376 v1(38.617,22.442)
NetJ1_10: J1.10 R11.1 U2.5 | length 20.1
  Top Layer w0.254: 60.725,25.575 60.8,25.5 R11.1 v1(61.5,23.3)
  GND 2 w0.254: v1(61.5,23.3) 62.545,24.345 J1.10
NetL2_1: L2.1 Q1.1 Q1.2 Q1.3 Q2.5 Q2.6 Q2.7 Q2.8 R2.1 U1.16 | length 4.1
  Top Layer w0.254: v1(32.245,27.775) 32.245,28.674 31.75,29.169 31.75,30.253 31.899,30.402 32.407,30.402 32.45,30.445 Q2.5
  Bottom Layer w0.254: v1(32.245,27.775) 32.3,27.72 32.3,27.3
NetL2_2: L2.2 R3.1 U1.10 | length 35.8
  Top Layer w0.254: R3.1 v1(28.847,41.375)
  GND 2 w0.254: v1@28.847,41.4 28.847,41.851 28.698,42 24.525,42 22.5,39.975 22.5,24.675 25.3,21.875 29.525,21.875 30.45,22.8 31.25,22.8 v1(31.75,23.3)
  Bottom Layer w0.254: v1(31.75,23.3) 32.327,23.3 32.35,23.277 U1.10
NetQ1_4: Q1.4 U1.17 | length 5.5
  Top Layer w0.254: v1(35.025,29.85) 35.038,29.863 35.838,29.863 Q1.4
  Bottom Layer w0.254: U1.17 32.873,26.823 32.873,27.226 32.881,27.233 32.881,29.006 33.725,29.85 v1(35.025,29.85)
NetQ2_4: Q2.4 U1.15 | length 8.9
  Top Layer w0.254: v1(31.875,33.675) Q2.4
  Bottom Layer w0.254: U1.15 31.2,25.95 31.177,25.973 31.177,26.12 31.175,26.122 31.175,32.975 v1(31.875,33.675)
NetR1_1: R1.1 R4.2 U1.20 | length 4.9
  Bottom Layer w0.254: U1.20 37.725,26.8 R4.2 R1.1
NetR6_2: R6.2 U1.1 | length 1.9
  Bottom Layer w0.254: U1.1 36.475,25.95 36.875,25.55 R6.2@36.9,25.55
NetR7_1: R7.1 R8.2 U1.8 | length 2.5
  Bottom Layer w0.254: R7.1 R8.2 R8.2@33.175,21.55 ; R8.2@33.175,21.625 33.35,21.8 U1.8
NetR9_2: R9.2 U1.4 | length 1.6
  Bottom Layer w0.254: U1.4 35.213,24.438 36.788,24.438 R9.2@36.8,24.425
NetR13_1: R13.1 R15.2 U2.2 | length 5.1
  Top Layer w0.254: R15.2 R13.1 ; R13.1@55.075,25.675 55.928,26.528 57.694,26.528 57.797,26.631 U2.2
V_5: C13.2 C15.2 J1.8 L3.2 R11.2 R14.2 | length 43.7
  Top Layer w0.254: v1(56.15,33.875) 56.15,35.3 C15.2 ; v1(56.725,23.2) 56.735,23.21 C13.2 56.73,23.98 56.73,24.895 R14.2 ; R11.2 v1(61.55,22.45)
  GND 2 w0.254: v1(56.15,33.875) 56.084,33.941 55.366,33.941 54.55,33.125 54.55,24.875 56.225,23.2 v1(56.725,23.2) ; J1.8 57.465,38.665 53.425,34.625 53.425,23.8 54.975,22.25 61.256,22.25 61.456,22.45 v1(61.55,22.45)
V_12: C6.2 C7.2 J1.1 R3.2 R7.2 R12.2 U1.9 | length 89.6
  Top Layer w0.254: v1(29.65,41.375) R3.2 ; C6.2 36.5,41.05 v1(36.5,39.975)
  GND 2 w0.254: v1@29.625,41.375 29.625,42.551 29.476,42.7 24.275,42.7 21.875,40.3 21.875,24.2 24.85,21.225 29.75,21.225 30.7,22.175 v1(31.275,22.175) ; v1(31.375,20.675) 24.45,20.675 21.225,23.9 21.225,40.675 23.775,43.225 35.35,43.225 36.5,42.075 v1(36.5,39.975)
  Bottom Layer w0.254: v1(31.275,22.175) 32.438,22.175 32.827,22.564 32.827,23.077 U1.9 ; v1(31.375,20.675) R7.2
  other v1: 51.825,29.225 51.825,30.025
V_PV: C1.2 C2.2 J1.3 L1.1
pads on no net: U1.2 U1.3 U1.11 U1.12

## Polygon pours and split planes (outlines as drawn)
GND on Top Layer "GND_L01_P008" (solid, pour order 8): 29.2,19.85 29.2,26.85 39.275,26.85 39.275,19.85
NetL2_2 on Top Layer "NETL2_2_L01_P000" (solid, pour order 0): 24.6,39.825 24.6,40.45 26.375,42.225 28.375,42.225 28.349,42.199 28.349,41.026 29.575,39.8 29.9,39.8
V_PV on Top Layer "V_PV_L01_P002" (solid, pour order 2): 43.8,40.875 45.7,40.875 45.7,36.125 45.45,35.875 40.875,35.875 40.325,36.425 40.325,37.375 41.15,38.2 42.925,38.2 43.8,39.075
V_12 on Top Layer "V_12_L01_P011" (solid, pour order 11): 30.175,42.2 39.5,42.2 40.85,40.85 40.85,38.875 38.675,38.875 38.675,39.525 37.775,40.425 30.2,40.425 30.175,40.4
GND on Top Layer "GND_L01_P010" (solid, pour order 10): 31.85,39.75 37.7,39.75 37.8,39.65 37.8,37.65 31.85,37.65
GND on Top Layer "GND_L01_P009" (solid, pour order 9): 55.275,33.6 57.075,33.6 57.075,28.95 55.275,28.95
NetL2_1 on Top Layer "NETL2_1_L01_P004" (solid, pour order 4): 36.25,30.35 34.675,30.35 34.4,30.075 24.6,30.075 24.6,32.275 24.95,32.625 35.625,32.625 36.25,32
NetC5_2 on Top Layer "NETC5_2_L01_P003" (solid, pour order 3): 39.675,37.15 39.675,30.125 39.25,29.7 36.875,29.7 36.875,32 37.9,33.025 37.9,36.25 38.8,37.15
V_5 on Top Layer "V_5_L01_P001" (solid, remove dead copper, pour order 1): 55.275,36.175 55.275,37.7 56.425,38.85 56.425,41.025 58.6,41.025 58.6,38.85 61.075,36.375 61.075,36.175
GND on GND 1 "GND_L02_P005" (solid, pour order 5): 20.225,43.825 20.225,19.85 64.75,19.85 64.75,43.825
GND on Bottom Layer "GND_L04_P012" (solid, pour order 12): 20.225,43.825 20.225,19.85 64.75,19.85 64.75,43.825
V_12 on Bottom Layer "V_12_L04_P007" (solid, pour order 7): 38.475,40.95 40.75,40.95 40.75,38.825 40.75,35.15 45.475,30.425 52.35,30.425 52.35,28.725 44.225,28.725 38.682,34.268 38.682,40.928
GND on GND 2 "GND_L03_P006" (solid, pour order 6): 20.225,43.825 20.225,19.85 64.75,19.85 64.75,43.825

## Other copper
Top Layer:
  rectangle net V_12: 51.4,28.875 53.65,30.375
  rectangle net GND: 32.9,32.9 37.35,35.725
  rectangle net GND: 36.975,37.65 37.8,39.65
  rectangle net GND: 34.5,37.65 36.025,39.75
  rectangle net GND: 31.85,37.65 34.6,39.75
  rectangle net GND: 41.15,34.025 44.25,35.65
  rectangle net GND: 46.175,36.225 48.25,38.075
  rectangle net V_5: 55.275,34.25 60.75,36.3
  region net NetC12_2: 58.575,26.975 59.035,27.435 58.716,27.753 58.257,27.293
  rectangle net NetC12_2: 52.3,27.1 58.8,28.4
Bottom Layer:
  rectangle net NetC18_2: 33.975,27.7 35.375,29.2
  rectangle net NetC12_2: 55.275,26.95 59.375,28.425

## Silkscreen, mask and mechanical layers (free items; w line width, h text height)
Top Overlay:
  lines w0.2: 58.35,25.35 61.1,25.35 61.1,28.927 58.35,28.927 58.35,25.35
  text "70 VINmax 12V/5V Power Board v1.0" at 21.284,20.375 h1.52 r90
Mechanical 1:
  the board outline again, w0.254